# EAGLE board 2.2 (EAGLE 8.2.2)
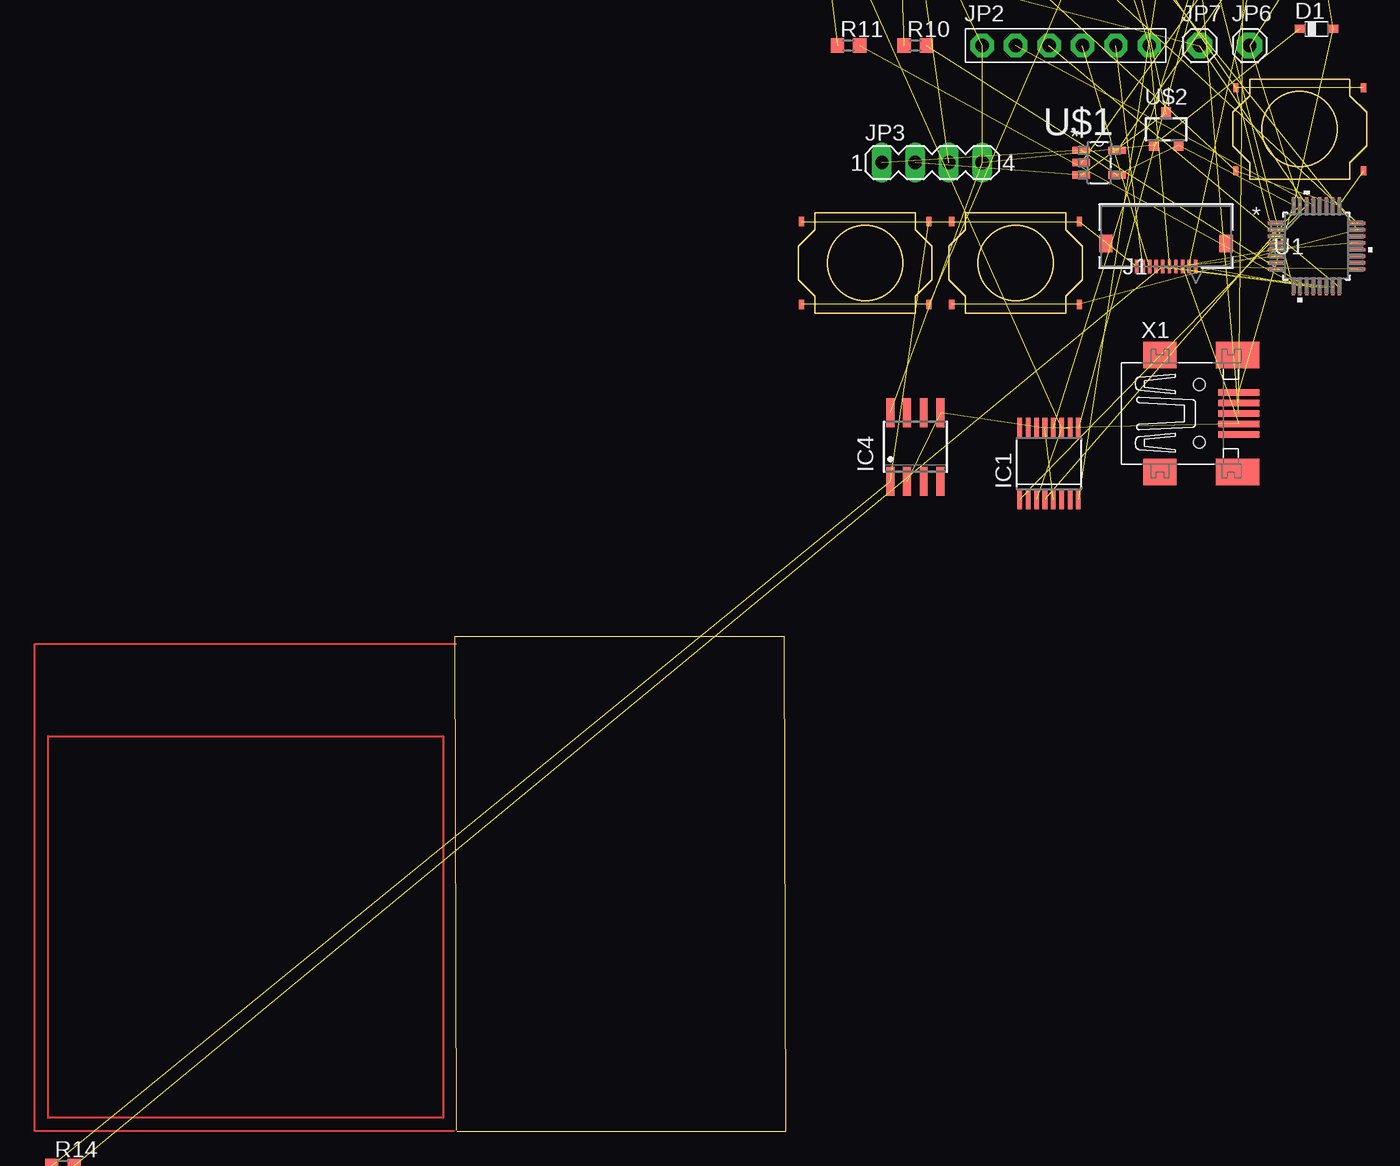
[diagram p0: board, top side]

Size 69.29 x 79.91 mm. Coordinates in mm from the lower left corner, seen from the top.
Outline: 0.18,0 25.17,0 25.07,37.56 0,37.56 0.1,0.08
Copper layers (1*16): Top 0.035mm / dielectric 1.5mm / Bottom 0.035mm
Design rules "default": minimum track width 6mil, minimum drill 0.35mm, track to track 6mil, track to pad 6mil, pad to pad 6mil, via to via 6mil, smd to smd 6mil, copper to edge 40mil, drill to drill 6mil, minimum pad ring 10mil, minimum via ring 8mil, stop-mask expansion 4mil, vias tented up to drill 0mil, thermal gap 10mil

## Footprints (pad centres in the part's own frame; a part is rotated, then mirrored left to right if it is on the bottom)
C0603K = smd 1.05 x 1.08: 1 -0.875,0; 2 0.875,0
SOD323_ST = smd 0.8 x 0.6: A 1.25,0; C -1.25,0
SSOP16 = smd 0.35 x 1.55: 1 -2.223,-2.7; 2 -1.587,-2.7; 3 -0.953,-2.7; 4 -0.318,-2.7; 5 0.318,-2.7; 6 0.953,-2.7; 7 1.587,-2.7; 8 2.223,-2.7; 9 2.223,2.7; 10 1.587,2.7; 11 0.953,2.7; 12 0.318,2.7; 13 -0.318,2.7; 14 -0.953,2.7; 15 -1.587,2.7; 16 -2.223,2.7
SO08 = smd 0.6 x 2.2: 1 -1.905,-2.6; 2 -0.635,-2.6; 3 0.635,-2.6; 4 1.905,-2.6; 5 1.905,2.6; 6 0.635,2.6; 7 -0.635,2.6; 8 -1.905,2.6
CON10_1X10_DBR_XF2L = smd 0.254 x 1.016: 1 2.25,2.286; 2 1.75,2.286; 3 1.25,2.286; 4 0.75,2.286; 5 0.25,2.286; 6 -0.25,2.286; 7 -0.75,2.286; 8 -1.25,2.286; 9 -1.75,2.286; 10 -2.25,2.286 | smd 1.016 x 1.346: 11 -4.572,4.013; 12 4.572,4.013
1X06-BIG = drill 1.016 pad 1.778 octagon: 1 -6.35,0; 2 -3.81,0; 3 -1.27,0; 4 1.27,0; 5 3.81,0; 6 6.35,0
MA04-1 = drill 1.016 long: 1 -3.81,0; 2 -1.27,0; 3 1.27,0; 4 3.81,0
1X01 = drill 1.016 pad 1.93 octagon: 1 0,0
0402 = smd 0.7 x 0.9: 1 -0.65,0; 2 0.65,0
1206 = smd 1.6 x 1.803: A -1.422,0; C 1.422,0
R0603 = smd 1 x 1.1: 1 -0.85,0; 2 0.85,0
32A-L = smd 1.168 x 0.229: 1 -3.124,1.751; 2 -3.124,1.251; 3 -3.124,0.751; 4 -3.124,0.25; 5 -3.124,-0.25; 6 -3.124,-0.751; 7 -3.124,-1.251; 8 -3.124,-1.751; 17 3.124,-1.751; 18 3.124,-1.251; 19 3.124,-0.751; 20 3.124,-0.25; 21 3.124,0.25; 22 3.124,0.751; 23 3.124,1.251; 24 3.124,1.751 | smd 0.229 x 1.168: 9 -1.751,-3.124; 10 -1.251,-3.124; 11 -0.751,-3.124; 12 -0.25,-3.124; 13 0.25,-3.124; 14 0.751,-3.124; 15 1.251,-3.124; 16 1.751,-3.124; 25 1.751,3.124; 26 1.251,3.124; 27 0.751,3.124; 28 0.25,3.124; 29 -0.25,3.124; 30 -0.751,3.124; 31 -1.251,3.124; 32 -1.751,3.124
SOT95P270X145-5N = smd 1.321 x 0.559: 1 -1.372,0.94; 2 -1.372,0; 3 -1.372,-0.94; 4 1.372,-0.94; 5 1.372,0.94
SOT346-R = smd 0.7 x 0.9: 1 -0.95,-1.2; 2 0.95,-1.2; 3 0,1.2
TL3315NF100Q-PACKAGE = smd 0.4 x 0.7: 1 -4.85,3.15; 2 4.85,3.15; 3 -4.85,-3.15; 4 4.85,-3.15
32005-301 = smd 3.1 x 0.5: 1 3,1.6; 2 3,0.8; 3 3,0; 4 3,-0.8; 5 3,-1.6 | smd 2.5 x 2: M1 -3,-4.45; M2 -3,4.45 | smd 3.3 x 2: M3 2.9,4.45; M4 2.9,-4.45 | hole 0.9: 0,2.2; 0,-2.2

## Placement (x,y rotation side)
C1  1uF  [C0603K]  54.05,98.96 0 top  (outside the outline)
C2  1uF  [C0603K]  50.24,98.96 0 top  (outside the outline)
C3  1uF  [C0603K]  46.43,98.96 0 top  (outside the outline)
C4  2.2uF  [C0603K]  40.08,93.88 0 top  (outside the outline)
C5  47pF  [C0603K]  66.75,98.96 0 top  (outside the outline)
C6  47pF  [C0603K]  61.67,98.96 0 top  (outside the outline)
C7  10nF  [C0603K]  29.92,93.88 0 top  (outside the outline)
C8  4.7uF  [C0603K]  35,93.88 0 top  (outside the outline)
C9  100nF  [C0603K]  50.24,93.88 0 top  (outside the outline)
C10  100nF  [C0603K]  45.16,93.88 0 top  (outside the outline)
C19  1uF  [C0603K]  57.86,98.96 0 top  (outside the outline)
D1  BAT60J  [SOD323_ST]  65.48,83.72 0 top  (outside the outline)
IC1  FT230XS  [SSOP16]  45.16,50.7 0 top
IC4  L4931D  [SO08]  35,51.97 0 top
J1  XF2L-1025-1A  [CON10_1X10_DBR_XF2L]  54.05,63.4 0 top
JP2  [1X06-BIG]  46.43,82.45 0 top
JP3  [MA04-1]  36.27,73.56 0 top
JP6  [1X01]  60.4,82.45 0 top
JP7  [1X01]  56.59,82.45 0 top
L1  [0402]  61.67,102.77 0 top  (outside the outline)
LED4  [1206]  41.35,97.69 0 top  (outside the outline)
LED5  [1206]  35,97.69 0 top  (outside the outline)
LED6  [1206]  28.65,97.69 0 top  (outside the outline)
LED7  [1206]  66.75,102.77 0 top  (outside the outline)
R1  2K  [R0603]  62.94,93.88 0 top  (outside the outline)
R2  10K  [R0603]  51.51,88.8 0 top  (outside the outline)
R3  10K  [R0603]  46.43,88.8 0 top  (outside the outline)
R4  10K  [R0603]  41.35,88.8 0 top  (outside the outline)
R5  10K  [R0603]  36.27,88.8 0 top  (outside the outline)
R6  27  [R0603]  59.13,93.88 0 top  (outside the outline)
R7  27  [R0603]  55.32,93.88 0 top  (outside the outline)
R8  10K  [R0603]  31.19,88.8 0 top  (outside the outline)
R9  10K  [R0603]  66.75,93.88 0 top  (outside the outline)
R10  330  [R0603]  35,82.45 0 top
R11  330  [R0603]  29.92,82.45 0 top
R12  10K  [R0603]  66.75,88.8 0 top  (outside the outline)
R13  100  [R0603]  61.67,88.8 0 top  (outside the outline)
R14  10K  [R0603]  -29.77,-2.64 0 top  (outside the outline)
R15  330  [R0603]  56.59,88.8 0 top  (outside the outline)
U1  ATMEGA328P-AUR32A-L  [32A-L]  65.48,67.21 0 top
U$1  [SOT95P270X145-5N]  48.97,73.56 0 top
U$2  2JS305  [SOT346-R]  54.05,76.1 0 top
U$3  TL3315NF100Q  [TL3315NF100Q-PACKAGE]  42.62,65.94 0 top
U$4  TL3315NF100Q  [TL3315NF100Q-PACKAGE]  31.19,65.94 0 top
U$11  TL3315NF100Q  [TL3315NF100Q-PACKAGE]  64.21,76.1 0 top
X1  MINI-USB-32005-301  [32005-301]  56.59,54.51 0 top

## Library data of the parts
C1-C10 C19 = rcl
D1 = diode
IC1 = ft230x_10; MF: FTDI; MPN: FT230XS; OC_FARNELL: 2081321; OC_NEWARK: 83T7087
IC4 = v-reg-3
J1 = MyParts; MANUFACTURER_PART_NUMBER: XF2L10251A; VENDOR: Omron
JP2 JP6 JP7 LED4-LED7 = adafruit
JP3 = con-lstb; OC_FARNELL: unknown; OC_NEWARK: unknown
L1 = inductors
R1-R5 R7-R15 = eagle-ltspice; SPICEMODEL: NONE; SPICEPREFIX: R
R6 = eagle-ltspice; SPICEMODEL: NONE; SPICEPREFIX: R6
U1 = MyParts; MANUFACTURER_PART_NUMBER: ATMEGA328PAUR; VENDOR: Atmel
U$1 = Microchip_By_element14_Batch_1; MPN: MCP73812T-420I/OT; OC_FARNELL: 1627187; OC_NEWARK: 27M0232; PACKAGE: SOT-5; SUPPLIER: Microchip
U$2 = SOT346-R
U$3 U$4 U$11 = MyParts
X1 = con-cypressindustries; OC_FARNELL: unknown; OC_NEWARK: unknown

## Nets
8: IC1.8 R7.1
9: IC1.9 R6.1
B0: R2.2 U1.23 U$3.3 U$3.4
B1: R3.2 U1.24 U$4.3 U$4.4
B2: R4.2 U1.25 U$11.3 U$11.4
FTDI_VCC: IC1.12 L1.1
GND: C1.2 C2.2 C3.2 C4.2 C5.1 C6.2 C7.2 C8.2 C9.2 C10.2 C19.2 IC1.5 IC1.13 IC4.2 IC4.5 J1.3 J1.5 JP2.6 JP3.3 LED4.A LED5.C LED6.C LED7.C R2.1 R3.1 R4.1 R5.1 R12.2 R13.2 U1.3 U1.5 U1.21 X1.4
KATHODE: J1.2 R13.1
LCD_RESET: J1.7 U1.13
LEDANODE: J1.1 U1.12
MISO: JP2.3 U1.16
MOSI: J1.8 JP2.4 U1.15
N$1: R1.2 U$1.5
N$2: R1.1 U$1.2
N$3: R15.2 U1.9
N$11: LED5.A R10.1
N$12: LED6.A R11.1
N$13: LED7.A R15.1
N$16: R11.2 U1.10
N$17: U1.18
N$20: R10.2 U1.11
N$26: J1.12
N$27: J1.11
NET1: C10.1 IC1.3 IC1.10 IC1.11 R8.1 R9.1
RESET: JP2.2 U1.29
RXD: IC1.1 JP7.1 R8.2 U1.30
SCK: J1.9 JP2.5 U1.17
SHEILD: X1.5
SS: J1.6 R14.2 U1.14
TXD: IC1.4 JP6.1 R9.2 U1.31
USB+: C6.1 R7.2 X1.3
USB-: C5.2 R6.2 X1.2
VBAT: C2.1 JP3.2 U$1.3 U$2.3
VCC: C4.1 C7.1 C8.1 C9.1 IC4.1 J1.4 J1.10 L1.2 LED4.C R14.1 U1.4 U1.6 U$3.1 U$3.2 U$4.1 U$4.2 U$11.1 U$11.2
VDD: C3.1 C19.1 D1.C IC4.8 JP2.1 JP3.4 R5.2 U$2.1
VUSB: C1.1 D1.A JP3.1 R12.1 U1.32 U$1.1 U$1.4 U$2.2 X1.1

## Tracks (layer width: path | path; a pad name or v marks a point on that pad's centre or on a via)
8  (1 unrouted)
9  (1 unrouted)
B0  (3 unrouted)
B1  (3 unrouted)
B2  (3 unrouted)
FTDI_VCC  (1 unrouted)
GND  (32 unrouted)
KATHODE  (1 unrouted)
LCD_RESET  (1 unrouted)
LEDANODE  (1 unrouted)
MISO  (1 unrouted)
MOSI  (2 unrouted)
N$1  (1 unrouted)
N$2  (1 unrouted)
N$3  (1 unrouted)
N$4
  Top 0.152: 0.1,37 -31.9,37 -31.9,0 -0.05,0 | -0.9,30 -0.9,1 -30.9,1 -30.9,30 -0.9,30
N$11  (1 unrouted)
N$12  (1 unrouted)
N$13  (1 unrouted)
N$16  (1 unrouted)
N$20  (1 unrouted)
NET1  (5 unrouted)
RESET  (1 unrouted)
RXD  (3 unrouted)
SCK  (2 unrouted)
SS  (2 unrouted)
TXD  (3 unrouted)
USB+  (2 unrouted)
USB-  (2 unrouted)
VBAT  (3 unrouted)
VCC  (17 unrouted)
VDD  (7 unrouted)
VUSB  (8 unrouted)